# Altium PCB Quadcopter_v1.0_invalid.PcbDoc
Units mm, origin at the board's own origin, x right, y up, seen from the top; angles counter-clockwise.
Board outline 152.4 x 101.6 mm, 2 copper layers (Top Layer, Bottom Layer); 33 components, 22 nets, 155 pads, 0 vias.
Unrouted connection lines stored in the file: 85.
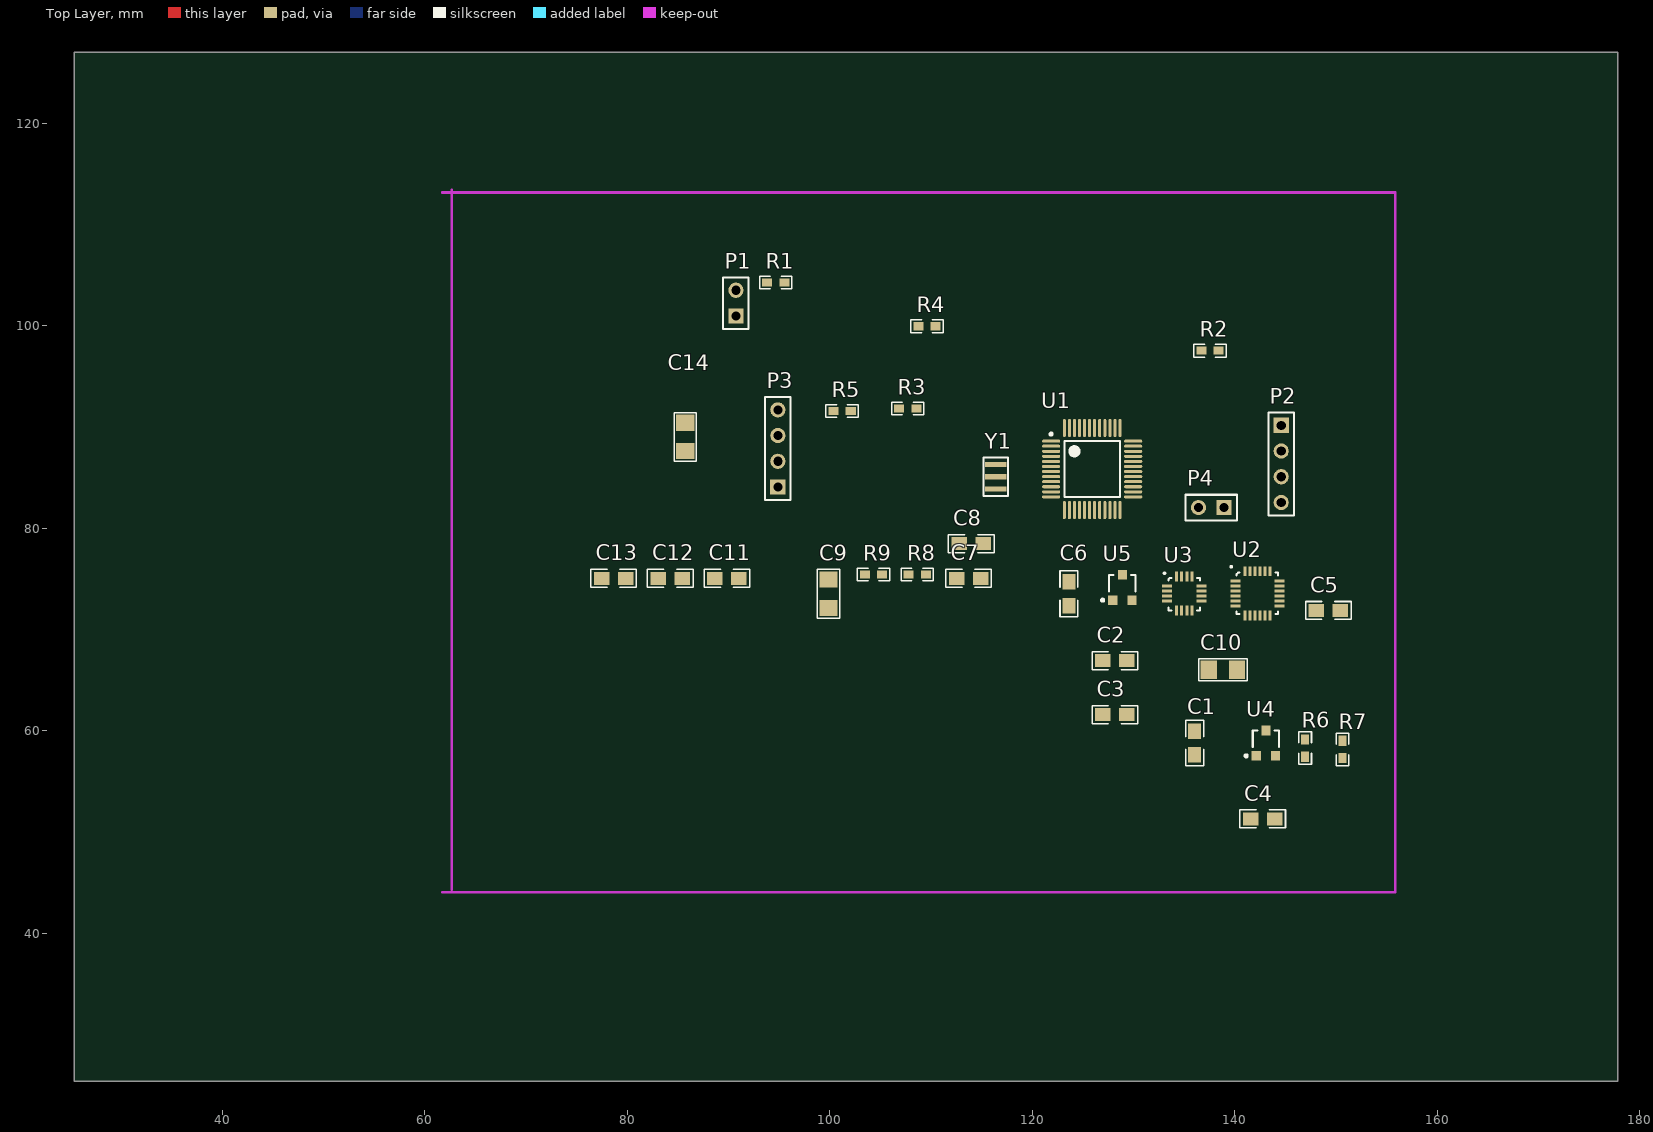
[diagram p0: Top Layer view]
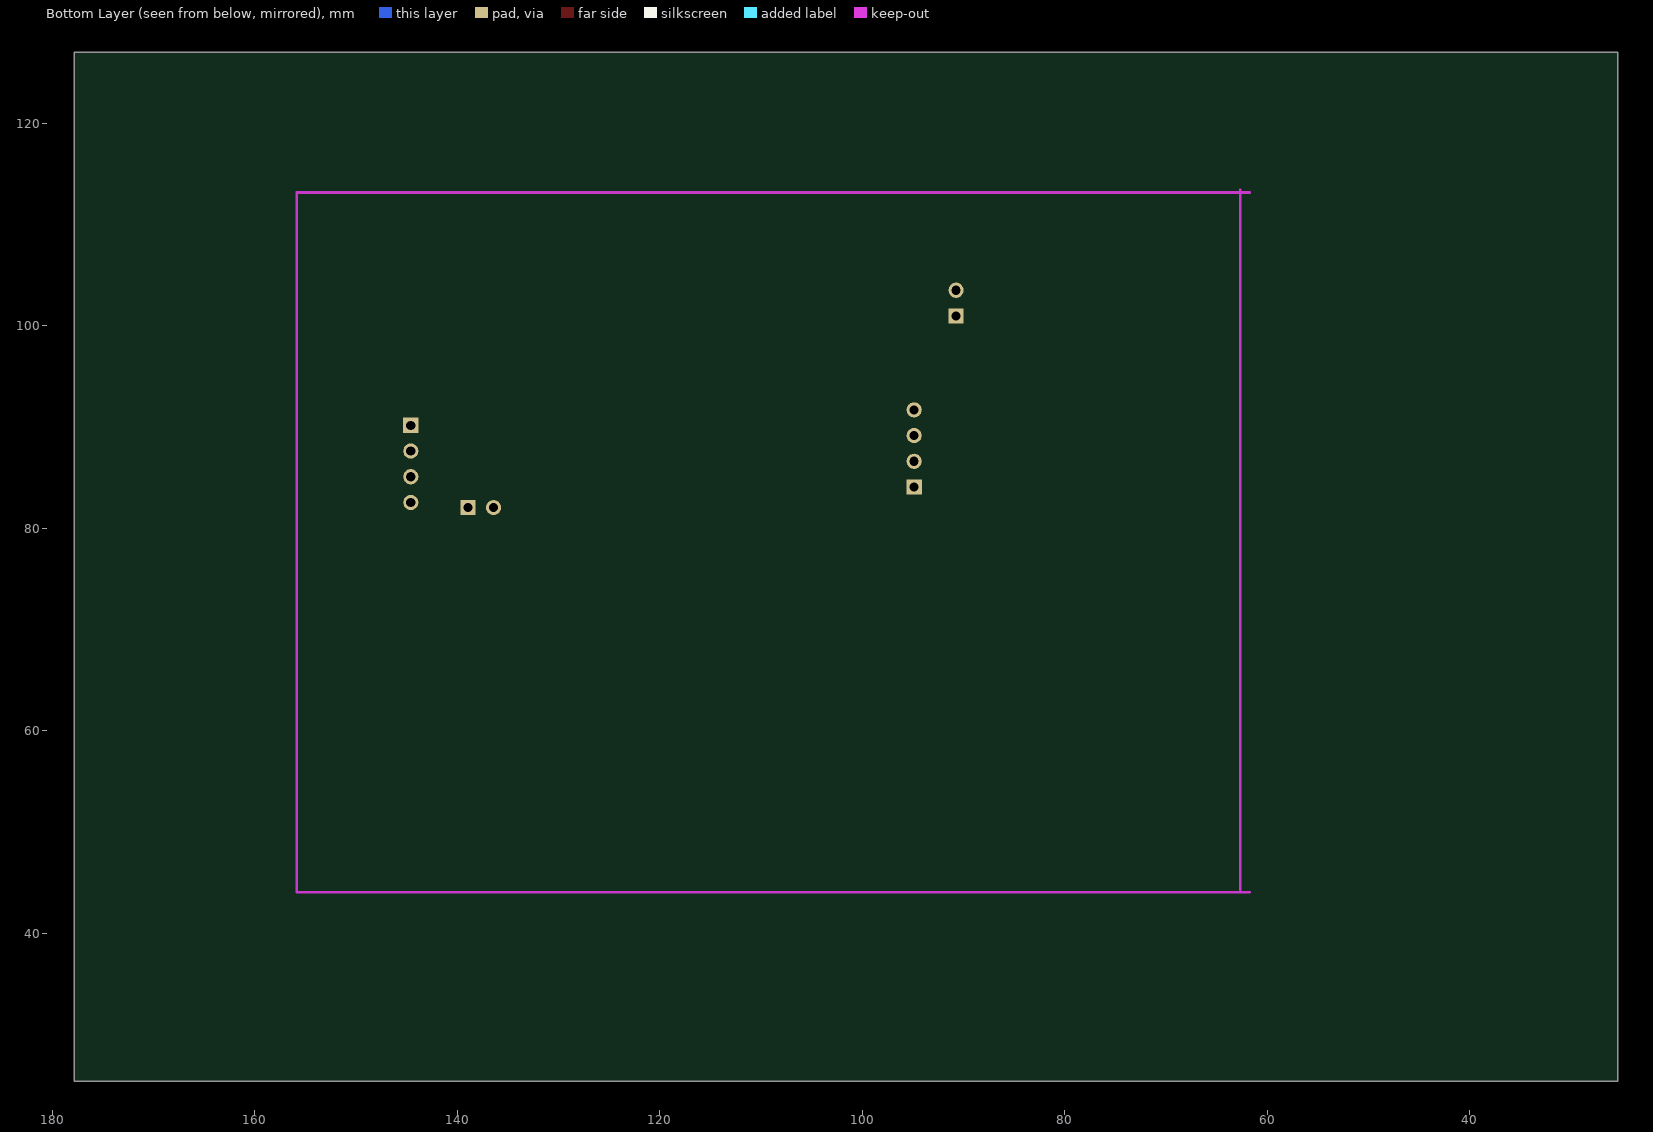
[diagram p1: Bottom Layer view, seen from below]

## Layer stack, top to bottom
Top Solder: solder mask 0.0102, Solder Resist, Dk 3.5
Top Layer: signal copper 0.0356
Dielectric 1: dielectric 0.32, FR-4, Dk 4.8
Bottom Layer: signal copper 0.0356
Bottom Solder: solder mask 0.0102, Solder Resist, Dk 3.5

## Board outline
25.4,25.4 177.8,25.4 177.8,127 25.4,127

## Design rules (kind name [scope] priority, off if disabled: settings)
Clearance [All] p1: gap=0.254
PolygonConnect [All] p1: connectstyle=Relief reliefconductorwidth=0.254 reliefentries=4 polygonreliefangle="90 Angle" airgapwidth=0.254
RoomDefinition Quadcopter_v1.0 [InComponentClass('Quadcopter_v1.0')] p1: confinementstyle=ConfineIn formatcopy=TRUE lockcomponents=FALSE outline 62.404,44.45 155.368,44.45 155.368,113.157 62.404,113.157
RoutingVias [All] p1: holewidth=0.711 width=1.27 viastyle="Through Hole" minholewidth=0.711 minwidth=1.27 maxholewidth=0.711 maxwidth=1.27
SolderMaskExpansion [All] p1: expansion=0.102
Width [All] p1: maxlimit=0.254 minlimit=0.254 preferedwidth=0.254
30 further rules are at their usual default settings.

## Components (designator, comment, footprint, x,y, rotation, side; value= is the part's Value field where it differs from the comment)
C1 "100uF" c0805 136.017,58.801 r90 top
C2 "0.1uF" c0805 128.143,66.929 r0 top
C3 "0.1uF" c0805 128.143,61.595 r0 top
C4 "10uF" c0805 142.748,51.308 r0 top
C5 "Ceramic, X7R, 2.2nF ±10%, 50V" c0805 149.225,71.882 r0 top
C6 "0.1uF" c0805 123.618,73.533 r90 top
C7 "0.1uF" c0805 113.712,75.057 r0 top
C8 "10uF" c0805 113.966,78.483 r0 top
C9 "0.1uF" C1206 99.869,73.533 r90 top
C10 "0.1uF" C1206 138.811,66.04 r180 top
C11 "0.1uF" c0805 89.836,75.057 r0 top
C12 "0.1uF" c0805 84.248,75.057 r0 top
C13 "10nF" c0805 78.66,75.057 r0 top
C14 "0.1uF" C1206 85.725,89.027 r90 top
P1 "Header 2" HDR1X2 90.725,100.965 r90 top
P2 "Header 4" HDR1X4 144.573,90.167 r270 top
P3 "Header 4" HDR1X4 94.869,84.074 r90 top
P4 "Header 2" HDR1X2 138.938,82.042 r180 top
R1 "Res3" r0603 94.662,104.267 r0 top
R2 "Res3" r0603 137.541,97.536 r0 top
R3 "Res3" r0603 107.696,91.821 r0 top
R4 "Res3" r0603 109.601,99.949 r0 top
R5 "Res3" r0603 101.219,91.567 r0 top
R6 "Res3" r0603 146.939,58.293 r270 top
R7 "Res3" r0603 150.622,58.166 r270 top
R8 "Res3" r0603 108.632,75.438 r0 top
R9 "Res3" r0603 104.314,75.438 r0 top
U1 "STM32F101CBT6" LQFP48_N 125.904,85.852 r0 top
U2 "MPU6050" "24 Lead QFN" 139.827,71.882 r0 top
U3 "HMC5983" "16 Lead QFN 2" 133.35,74.295 r0 top
U4 "ME6206A33" "SOT 23" 142.113,57.404 r0 top
U5 "ME6206A33" "SOT 23" 127.936,72.771 r0 top
Y1 "CSTCE8M00G52Z" X8MCSTCR 116.379,85.087 r90 top

## Footprints (in the part's own frame and the unit in brackets; to place one, negate y for a bottom-side part, rotate by r counter-clockwise, add the part's x,y. Pads: shape width x height; smd on the part's side, far side on the other; paste and mask are expansions set on the pad)
"16 Lead QFN 2" [mm]
  rect 1x0.3 smd: 1(-0.042,0.011) 2(-0.042,-0.489) 3(-0.042,-0.989) 4(-0.042,-1.489) 9(3.34,-1.489) 10(3.34,-0.989) 11(3.34,-0.489) 12(3.34,0.011)
  rect 0.3x1 smd: 5(0.899,-2.43) 6(1.399,-2.43) 7(1.899,-2.43) 8(2.399,-2.43) 13(2.399,0.952) 14(1.899,0.952) 15(1.399,0.952) 16(0.899,0.952)
  silkscreen extent -0.35,-2.4 3.18,1.32, body extent 0.13,-2.41 3.17,0.76, height 0.9
"24 Lead QFN" [mm]
  rect 0.95x0.3 smd: 1(0.228,2.932) 2(0.228,2.432) 3(0.228,1.932) 4(0.228,1.432) 5(0.228,0.932) 6(0.228,0.432) 13(4.578,0.432) 14(4.578,0.932) 15(4.578,1.432) 16(4.578,1.932) 17(4.578,2.432) 18(4.578,2.932)
  rect 0.3x0.95 smd: 7(1.153,-0.493) 8(1.653,-0.493) 9(2.153,-0.493) 10(2.653,-0.493) 11(3.153,-0.493) 12(3.653,-0.493) 19(3.653,3.857) 20(3.153,3.857) 21(2.653,3.857) 22(2.153,3.857) 23(1.653,3.857) 24(1.153,3.857)
  silkscreen extent -0.23,-0.37 4.45,4.37, body extent 0.38,-0.38 4.44,3.68, height 0.89
c0805 [mm]
  rect 1.524x1.27 smd: 1(-1.175,0) 2(1.175,0)
  silkscreen extent -2.25,-0.89 2.25,0.89, body extent -1,-0.6 1,0.6, height 1
C1206 [mm]
  rect 1.6x1.8 smd: 1(-1.4,0) 2(1.4,0)
  silkscreen extent -2.4,-1.1 2.4,1.1, body extent -1.6,-0.8 1.6,0.8, height 1.25
HDR1X2 [mm] "Connector; Header; 2 Position"
  rect 1.5x1.5 hole 0.9: 1(0,0)
  round 1.5 hole 0.9: 2(2.54,0)
  silkscreen extent -1.27,-1.27 3.81,1.27
HDR1X4 [mm] "Connector; Header; 4 Position"
  rect 1.5x1.5 hole 0.9: 1(0,0)
  round 1.5 hole 0.9: 2(2.54,0) 3(5.08,0) 4(7.62,0)
  silkscreen extent -1.27,-1.27 8.89,1.27
LQFP48_N [mm] "Thin QFP, 48-Leads, Body 7x7mm, Pitch 0.5mm, IPC Medium Density"
  oval 1.8x0.3 smd: 1(-4.05,2.75) 2(-4.05,2.25) 3(-4.05,1.75) 4(-4.05,1.25) 5(-4.05,0.75) 6(-4.05,0.25) 7(-4.05,-0.25) 8(-4.05,-0.75) 9(-4.05,-1.25) 10(-4.05,-1.75) 11(-4.05,-2.25) 12(-4.05,-2.75) 25(4.05,-2.75) 26(4.05,-2.25) 27(4.05,-1.75) 28(4.05,-1.25) 29(4.05,-0.75) 30(4.05,-0.25) 31(4.05,0.25) 32(4.05,0.75) 33(4.05,1.25) 34(4.05,1.75) 35(4.05,2.25) 36(4.05,2.75)
  oval 0.3x1.8 smd: 13(-2.75,-4.05) 14(-2.25,-4.05) 15(-1.75,-4.05) 16(-1.25,-4.05) 17(-0.75,-4.05) 18(-0.25,-4.05) 19(0.25,-4.05) 20(0.75,-4.05) 21(1.25,-4.05) 22(1.75,-4.05) 23(2.25,-4.05) 24(2.75,-4.05) 37(2.75,4.05) 38(2.25,4.05) 39(1.75,4.05) 40(1.25,4.05) 41(0.75,4.05) 42(0.25,4.05) 43(-0.25,4.05) 44(-0.75,4.05) 45(-1.25,4.05) 46(-1.75,4.05) 47(-2.25,4.05) 48(-2.75,4.05)
  silkscreen extent -4.17,-2.75 2.75,3.57, body extent -3.5,-3.5 3.5,3.5, height 1.6
r0603 [mm]
  rect 1x0.8 smd: 1(-0.85,0) 2(0.85,0)
  silkscreen extent -1.6,-0.62 1.6,0.62, body extent -0.79,-0.38 0.79,0.38, height 0.4
"SOT 23" [mm]
  rect 0.9x0.95 smd: 1(0,0.127) 2(1.9,0.127) 3(0.95,2.627)
  silkscreen extent -1.12,0 2.25,2.63, body extent -0.38,0.51 2.29,2.29, height 0.89
X8MCSTCR [mm]
  rect 0.5x2.1 smd: 1(-1.2,0) 2(0,0) 3(1.2,0)
  silkscreen extent -1.9,-1.22 1.9,1.22, body extent -1.75,-0.65 1.75,0.65, height 0.7

## Part data
C1 C2 C3 C4 C5 C7 C8 C11 C12 C13: library part "Cap Semi", "Capacitor (Semiconductor SIM Model)"
C6 C9 C10 C14: library part Cap, "Capacitor (Semiconductor SIM Model)"
P1 P4: "Header, 2-Pin"
P2 P3: "Header, 4-Pin"
R1 R2 R3 R4 R5 R6 R7 R8 R9: "Resistor"
U1: "STM32 ARM-based 32-bit MCU with 128 Kbytes Flash, 48-pin LQFP, Industrial Temperature"
U2: "MPU6050, 24pin"
U3: "HMC5983, 16pin"
U4 U5: library part ME6206, "ME6206A33, SOT23"
Y1: "Crystal Oscillator, 3rd In-Line Lead Version"

## Nets (pads, with @x,y where several pads share a name; then routed paths per layer and width w, separated by ;. In a path a pad name is that pad's centre, name@x,y a point inside that pad or via, vN(x,y) a via of type N, cw(c..) or ccw(c..) an arc to the next point about the centre after c; other vN are vias at no path point)
3V3: C3.2 C4.2 C9.2 C11.2 C13.2 P2.1 P3.1 R1.2 R4.2 R5.1 R6.2 R7.2 R8.2 R9.2 U1.9 U1.24 U1.36 U1.48 U2.8 U2.13 U3.2 U3.4 U3.6 U3.13 U4.2
3V3_EXT: C7.2 C8.2 U5.2
BAT: C1.2 C2.2 P4.2 U4.3 U5.3
BOOT0: P1.1 R1.1 U1.44
GND: C1.1 C2.1 C3.1 C4.1 C5.1 C7.1 C8.1 C9.1 C10.1 C11.1 C12.1 C13.1 C14.1 P1.2 P2.4 P3.4 P4.1 R2.1 R3.1 U1.8 U1.23 U1.35 U1.47 U2.9 U2.18 U3.9 U3.11 U4.1 U5.1 Y1.2
IIC_SCL: R7.1 U1.42 U2.23
IIC_SDA: R6.1 U1.43 U2.24
NetC5_2: C5.2 U2.20
NetC6_1: C6.1 U3.8
NetC6_2: C6.2 U3.12
NetC10_2: C10.2 U3.10
NetC12_2: C12.2 U2.10
NetC14_2: C14.2 R5.2 U1.7
NetR2_2: R2.2 U1.20
NetR8_1: R8.1 U2.6 U3.16
NetR9_1: R9.1 U2.7 U3.1
NetU1_5: U1.5 Y1.1
NetU1_6: U1.6 Y1.3
RX1: P2.3 U1.31
SWCLK: P3.3 R3.2 U1.37
SWDIO: P3.2 R4.1 U1.34
TX1: P2.2 U1.30
pads on no net: U1.1 U1.2 U1.3 U1.4 U1.10 U1.11 U1.12 U1.13 U1.14 U1.15 U1.16 U1.17 U1.18 U1.19 U1.21 U1.22 U1.25 U1.26 U1.27 U1.28 U1.29 U1.32 U1.33 U1.38 U1.39 U1.40 U1.41 U1.45 U1.46 U2.1 U2.2 U2.3 U2.4 U2.5 U2.11 U2.12 U2.14 U2.15 U2.16 U2.17 U2.19 U2.21 U2.22 U3.3 U3.5 U3.7 U3.14 U3.15

## Keep-outs
Keep-Out Layer:
  lines w0.254: 61.722,44.069 155.829,44.069 155.829,113.157 61.722,113.157 ; 62.658,44.32 62.658,113.408

## Silkscreen, mask and mechanical layers (free items; w line width, h text height)
Mechanical 1:
  lines w0.254: 52.959,46.863 52.959,66.294 52.959,114.427 55.88,117.348 157.353,117.348 162.433,112.268 162.433,44.45 156.083,38.1 61.722,38.1 52.959,46.863